# Altium PCB PCB1.PcbDoc
Units mil, origin at the board's own origin, x right, y up, seen from the top; angles counter-clockwise.
Board outline 3515 x 1700 mil, 2 copper layers (Top Layer, Bottom Layer); 31 components, 23 nets, 93 pads, 12 vias.
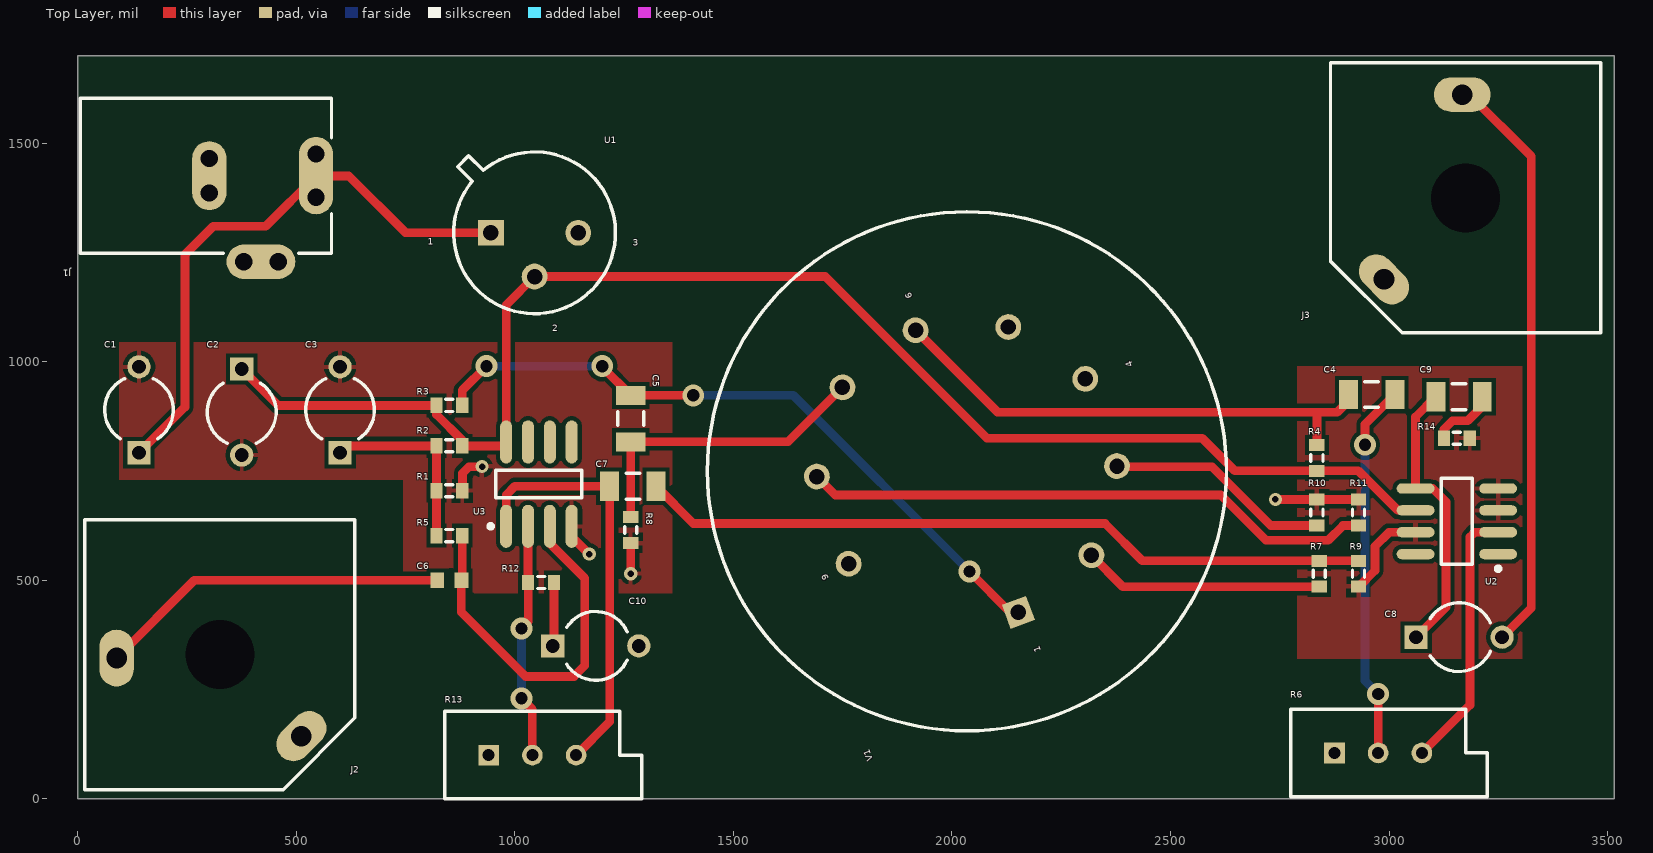
[diagram p0: Top Layer view]
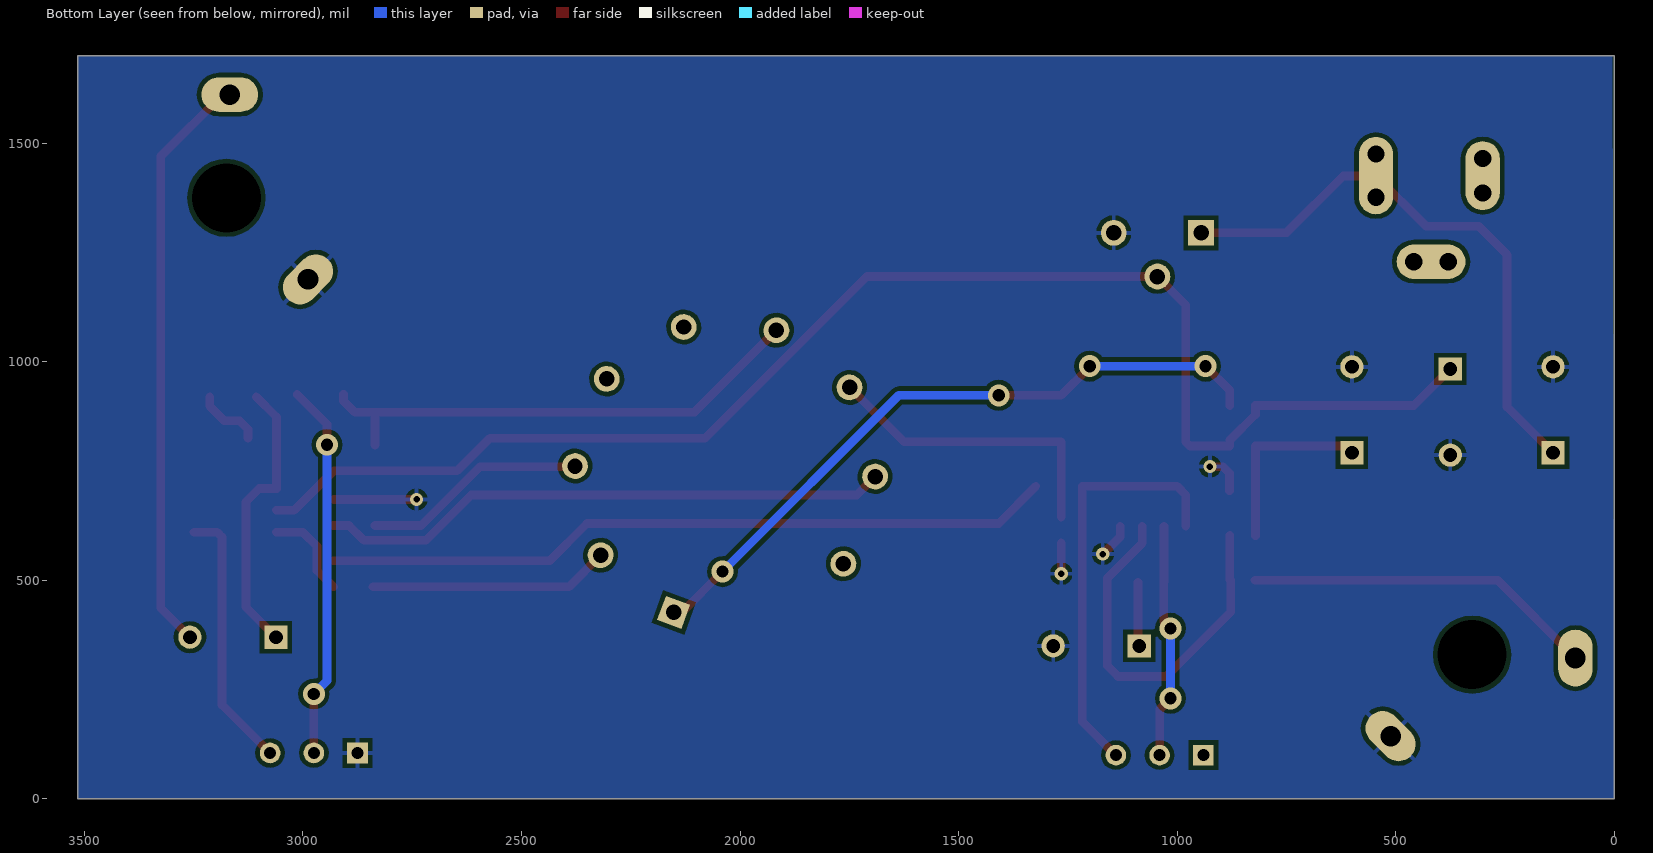
[diagram p1: Bottom Layer view, seen from below]

## Layer stack, top to bottom
Top Solder: solder mask 0.4, Solder Resist, Dk 3.5
Top Layer: signal copper 1.4
Dielectric 1: dielectric 12.6, FR-4, Dk 4.8
Bottom Layer: signal copper 1.4
Bottom Solder: solder mask 0.4, Solder Resist, Dk 3.5

## Board outline
0,0 3515,0 3515,1700 0,1700

## Design rules (kind name [scope] priority, off if disabled: settings)
Clearance [All] p1: gap=10
Height [All] p1: minheight=0 maxheight=5000 prefheight=500
PolygonConnect [All] p1: connectstyle=Relief reliefconductorwidth=10 reliefentries=4 polygonreliefangle="90 Angle" airgapwidth=10
RoutingVias [All] p1: holewidth=28 width=50 viastyle="Through Hole" minholewidth=28 minwidth=50 maxholewidth=28 maxwidth=50
SolderMaskExpansion [All] p1: expansion=4
Width [All] p1: maxlimit=20 minlimit=10 preferedwidth=20
29 further rules are at their usual default settings.

## Components (designator, comment, footprint, x,y, rotation, side; value= is the part's Value field where it differs from the comment)
C1 "Cap2" CAPR5-4X5 140,890 r90 top
C2 "Cap2" CAPR5-4X5 375,885 r270 top
C3 "Cap2" CAPR5-4X5 600,890 r90 top
C4 "Cap Semi" C1206 2960,925 r0 top
C5 "Cap Semi" C1206 1265,870 r270 top
C6 "Cap Semi" 1608[0603] 850,500 r0 top
C7 "Cap Semi" C1206 1270,715 r0 top
C8 "Cap2" CAPR5-4X5 3160,370 r0 top
C9 "Cap Semi" C1206 3160,920 r180 top
C10 "Cap2" CAPR5-4X5 1185,350 r0 top
J1 "PWR2.5" KLD-0202 5.63,1425.79 r0 top
J2 "Phonejack2" JACK/6-V2 325,330 r180 top
J3 "Phonejack2" JACK/6-V2 3175,1375 r90 top
R1 "Res3" J1-0603 850,705 r0 top
R2 "Res3" J1-0603 850,807.5 r180 top
R3 "Res3" J1-0603 850,900 r0 top
R4 "Res3" J1-0603 2835,780 r90 top
R5 "Res3" J1-0603 850,602.5 r180 top
R6 "RPot" VR5 2975,105 r0 top
R7 "Res3" J1-0603 2840,515 r90 top
R8 "Res3" J1-0603 1265,615 r270 top
R9 "Res3" J1-0603 2930,515 r90 top
R10 "Res3" J1-0603 2835,655 r90 top
R11 "Res3" J1-0603 2930,655 r90 top
R12 "Res3" J1-0603 1060,495 r0 top
R13 "RPot" VR5 1040,100 r0 top
R14 "Res3" J1-0603 3155,825 r0 top
U1 "MC78L12ACG" 79-05 1045,1295 r0 top
U2 "LM386M-1" M08A_N 3155,635 r180 top
U3 "TL072D" D008_M 1055,720 r90 top
V1 "Tube 12AX7" VTUBE-9 2034.2,749.33 r110 top

## Footprints (in the part's own frame and the unit in brackets; to place one, negate y for a bottom-side part, rotate by r counter-clockwise, add the part's x,y. Pads: shape width x height; smd on the part's side, far side on the other; paste and mask are expansions set on the pad)
79-05 [mm] "Can; 3 Leads; Pin Circle Dia. 5.08 mm; Lead Dia. 0.53 mm (max)"
  rect 1.5x1.5 hole 0.9: 1(-2.54,0)
  round 1.5 hole 0.9: 2(0,-2.54) 3(2.54,0)
  silkscreen extent -4.7,-4.7 4.7,4.7
1608[0603] [mm] "Chip Capacitor, Body 1.6x0.8mm, IPC High Density"
  rect 0.8x0.9 smd: 1(-0.7,0) 2(0.7,0)
  body extent -0.87,-0.48 0.87,0.48, height 1.3
C1206 [mm] "Chip Capacitor, Body 3.2x1.6mm, IPC High Density"
  rect 1.1x1.7 smd: 1(-1.35,0) 2(1.35,0)
  silkscreen extent -0.4,-0.75 0.4,0.75, body extent -1.7,-0.9 1.7,0.9, height 1.3
CAPR5-4X5 [mm] "Capacitor; 2 Leads"
  rect 1.35x1.35 hole 0.8: 1(-2.5,0)
  round 1.35 hole 0.8: 2(2.5,0)
  silkscreen extent -1.69,-2 1.82,2
D008_M [mm] "SOIC, 8-Leads, Body 4.9x3.9mm, Pitch 1.27mm, IPC Low Density"
  oval 2.5x0.7 smd: 1(-2.45,1.905) 2(-2.45,0.635) 3(-2.45,-0.635) 4(-2.45,-1.905) 5(2.45,-1.905) 6(2.45,-0.635) 7(2.45,0.635) 8(2.45,1.905)
  silkscreen extent -2.57,-2.5 0.8,2.93, body extent -2,-2.5 2,2.5, height 1.75
J1-0603 [mm] "Chip Resistor, Body 1.6x0.8mm, IPC High Density"
  rect 0.7x0.9 smd: 1(-0.75,0) 2(0.75,0)
  silkscreen extent -0.2,-0.35 0.2,0.35, body extent -0.85,-0.48 0.85,0.48, height 0.9
JACK/6-V2 [mm] "Connector; Jack Socket, 1/4\" [6.5mm], Thru-Hole, 2 Position, Vertical, Body 15.7 x 15.7 x 31 mm (WxTxH)"
  oval 2x3.3 hole 1.2: 1(6,0.2)
  oval 2x3.3 hole 1.2 rot 135: 5(-4.738,4.738)
  round 3.7 hole 4: MH1(0,0)
  silkscreen extent -7.85,-7.85 7.85,7.85
KLD-0202 [mm] "DC Power Jack, 2.5mm, KLD Series, PCB Mount"
  oval 2x4.5 all layers, no hole: 1(13.7,0)
  round 1.5 hole 1: 1A(13.7,-1.25) 1B(13.7,1.25) 2A(7.5,-1) 2B(7.5,1) 3A(9.5,-5) 3B(11.5,-5)
  oval 2x4 all layers, no hole: 2(7.5,0)
  oval 4x2 all layers, no hole: 3(10.5,-5)
  silkscreen extent 0,-4.5 14.6,4.5
M08A_N [mm] "SOIC, 8-Leads, Body 4.9x3.9mm, Pitch 1.27mm, IPC Medium Density"
  oval 2.2x0.6 smd: 1(-2.4,1.905) 2(-2.4,0.635) 3(-2.4,-0.635) 4(-2.4,-1.905) 5(2.4,-1.905) 6(2.4,-0.635) 7(2.4,0.635) 8(2.4,1.905)
  silkscreen extent -2.53,-2.5 0.9,2.88, body extent -2,-2.5 2,2.5, height 1.75
VR5 [mm] "Thru-Hole; 3 Leads"
  rect 1.2x1.2 hole 0.7: 1(-2.54,0)
  round 1.2 hole 0.7: 2(0,0) 3(2.54,0)
  silkscreen extent -5.08,-2.54 6.35,2.54
VTUBE-9 [mm] "Vacuum Tube; 9 Leads"
  rect 1.5x1.5 hole 0.9: 1(-8.725,0)
  round 1.5 hole 0.9: 2(-7.059,-5.128) 3(-2.696,-8.298) 4(2.696,-8.298) 5(7.059,-5.128) 6(8.725,0) 7(7.059,5.128) 8(2.696,8.298) 9(-2.696,8.298)
  silkscreen extent -15.08,-15.08 15.08,15.08

## Part data
C1 C2 C3 C8 C10: "Capacitor"
C4 C5 C6 C7 C9: "Capacitor (Semiconductor SIM Model)"
J1: "Low Voltage Power Supply Connector"
J2 J3: "Jack Socket, 1/4\" [6.5mm], Thru-Hole, Vertical, 2-Conductor Open Circuit"
R1 R2 R3 R4 R5 R7 R8 R9 R10 R11 R12 R14: "Resistor"
R6 R13: "Potentiometer"
U1: "3-Terminal Low-Current Positive Fixed Voltage Regulator"
U2: "Low Voltage Audio Power Amplifier, 8-pin Narrow SOIC"
U3: "Low-Noise JFET-Input Operational Amplifier"
V1: "High Mu Dual Triode"

## Via types
v1: diameter 50, hole 28, Top Layer to Bottom Layer, 8 vias
v2: diameter 30, hole 15, Top Layer to Bottom Layer, 4 vias

## Nets (pads, with @x,y where several pads share a name; then routed paths per layer and width w, separated by ;. In a path a pad name is that pad's centre, name@x,y a point inside that pad or via, vN(x,y) a via of type N, cw(c..) or ccw(c..) an arc to the next point about the centre after c; other vN are vias at no path point)
GND: C1.2 C2.2 C3.2 C10.2 J2.5 J3.5 R1.2 R6.1 R8.2 R9.1 R10.2 R11.2 R14.2 U1.3 U2.3 U2.4 U2.7 U3.4 | length 681.4
  Top Layer w20: C1.2 C1.2@156.57,988.43 ; C2.2@358.43,786.57 C2.2 ; C3.2 C3.2@601.57,990 ; R1.2 880,705.47 880,745 895,760 v2(925,760) ; U3.4 1130,600 v2(1170,560) ; v2(1265,515) R8.2 ; v2(2740,685) R11.2@2929.53,685 ; R9.1 2930.72,485.47 2967.72,522.46 2967.72,577.72 3000,610 U2.7
NetC1_1: C1.1 J1.1 J1.1A J1.1B U1.1 | length 1334.9
  Top Layer w20: C1.1@131.57,791.57 C1.1 245,896.57 245,1245 310,1310 430,1310 545,1425 J1.1 545.79,1425 620,1425 750,1295 U1.1
NetC3_1: C3.1 R1.1 R2.2 R5.2 | length 432.1
  Top Layer w20: C3.1 615.93,807.5 R2.2 R1.1 R5.2
NetC4_1: C4.1 R4.2 V1.6 | length 1170.5
  Top Layer w20: V1.6 2104.3,884.53 2830,884.53 ; R4.2 2835,879.53 2830,884.53 ; C4.1 2906.85,910 2881.38,884.53 2830,884.53
NetC4_2: C4.2 R6.2 | length 874.8
  Top Layer w20: v1(2945,810) 2945,856.85 C4.2 ; v1(2975,240) R6.2 R6.2@2985,115
  Bottom Layer w20: v1(2945,810) 2945,270 v1(2975,240)
NetC5_1: C5.1 R3.2 V1.1 | length 1564.9
  Top Layer w20: R3.2 879.53,934.53 v1(935,990) ; v1@1200,988.15 C5.1 v1(1408.15,923.15) ; v1(2040,520) 2133.46,426.54 V1.1
  Bottom Layer w20: v1@936.85,988.15 v1(935,990) v1(1200,990) ; v1(1408.15,923.15) 1636.85,923.15 v1(2040,520)
NetC5_2: C5.2 R8.1 V1.7 | length 708.3
  Top Layer w20: R8.1 C5.2 1624.86,816.85 V1.7
NetC6_1: C6.1 J2.1 | length 807.3
  Top Layer w20: J2.1 266.65,500 C6.1
NetC6_2: C6.2 R5.1 U3.3 | length 881.4
  Top Layer w20: R5.1 879.53,501.97 C6.2 877.56,427.44 1025,280 1135,280 1160,305 1160,505 1080,585 U3.3
NetC7_1: C7.1 R13.3 U3.1 | length 963.4
  Top Layer w20: U3.1 980,695 1000,715 C7.1 1216.85,176.85 R13.3
NetC7_2: C7.2 R7.2 R9.2 | length 1677.5
  Top Layer w20: C7.2 1408.15,630 2350,630 2435.47,544.53 R7.2 R9.2
NetC8_1: C8.1 C9.2 U2.5 | length 649.4
  Top Layer w20: C8.1 3130,438.43 3130,680 3100,710 U2.5 3060.51,873.66 C9.2
NetC8_2: C8.2 J3.1 | length 1343.9
  Top Layer w20: J3.1 3183.78,1611.22 3325,1470 3325,436.57 C8.2
NetC9_1: C9.1 R14.1 | length 151.8
  Top Layer w20: R14.1 3125.47,845.47 3145,865 3180,865 3213.15,898.15 C9.1
NetC10_1: C10.1 R12.2 | length 146.2
  Top Layer w20: C10.1 1089.53,352.95 R12.2
NetJ1_2: J1.2 J1.2A J1.2B
NetJ1_3: J1.3 J1.3A J1.3B
NetR6_3: R6.3 U2.2 | length 608.8
  Top Layer w20: R6.3 3185,215 3185,599.25 3195.75,610 U2.2
NetR7_1: R7.1 V1.2 | length 550.8
  Top Layer w20: V1.2 2390.75,485.47 R7.1
NetR10_1: R10.1 V1.3 | length 511.9
  Top Layer w20: V1.3@2378.81,760 2595,760 2729.53,625.47 R10.1
NetR11_1: R11.1 V1.8 | length 1313.4
  Top Layer w20: V1.8 1733.25,695 2615,695 2718.31,591.69 2861,591.69 2894.78,625.47 R11.1
NetR12_1: R12.1 R13.2 U3.2 | length 540.5
  Top Layer w20: v1(1015,230) 1040,205 R13.2 ; v1(1015,390) 1030.47,405.47 R12.1 1030,495.47 U3.2
  Bottom Layer w20: v1(1015,230) v1(1015,390)
VCC: C2.1 R2.1 R3.1 R4.1 U1.2 U2.6 U3.8 | length 3343.8
  Top Layer w20: C2.1 458.43,900 R3.1 820.47,879.53 879.53,820.47 R2.1 971.04,807.5 U3.8 980,1130 U1.2 1710,1195 2080,825 2572.43,825 2646.95,750.47 R4.1 2929.53,750.47 3020,660 U2.6
pads on no net: J2.MH1 J3.MH1 R13.1 U2.1 U2.8 U3.5 U3.6 U3.7 V1.4 V1.5 V1.9

## Polygon pours and split planes (outlines as drawn)
GND on Bottom Layer "GND" (solid, pour order 0): 4.11,1700 3515,1700 3515,0 0,0
GND on Top Layer "GND" (solid, pour order 14): 95,1045 95,730 745,730 745,470 1360,470 1360,1045 1205,1045
GND on Top Layer "GND" (solid, pour order 16): 2790,990 3305,990 3305,320 2790,320

## Text inside footprints (layer, text, board x,y; h text height)
J1: Mechanical 1 "Alert PCB fab to slot details" at 16.89,1664.6 h15; Mechanical 1 "Assign keep-out area to slot" at 16.89,1684.29 h15; Mechanical 1 "Mech 1 - Slot cut-out" at 16.89,1644.92 h15; Mechanical 1 "Mech 2 - Clearance, move to internal plane if present" at 16.89,1625.23 h15
J2: Mechanical 1 "Alert PCB fab to slot details" at 636.02,-50.31 h15 r180; Mechanical 1 "Slot 1.2x2.5mm, PTH" at 636.02,-30.63 h15 r180; Mechanical 1 "Assign keep-out area to slot" at 636.02,-70 h15 r180; Mechanical 1 "Mech 1 - Slot cut-out" at 636.02,-10.94 h15 r180; Mechanical 1 "Mech 2 - Clearance, move to internal plane if present" at 636.02,8.74 h15 r180
J3: Mechanical 1 "Alert PCB fab to slot details" at 2794.69,1063.98 h15 r90; Mechanical 1 "Slot 1.2x2.5mm, PTH" at 2814.37,1063.98 h15 r90; Mechanical 1 "Assign keep-out area to slot" at 2775,1063.98 h15 r90; Mechanical 1 "Mech 1 - Slot cut-out" at 2834.06,1063.98 h15 r90; Mechanical 1 "Mech 2 - Clearance, move to internal plane if present" at 2853.74,1063.98 h15 r90
U1: Top Overlay "1" at 800.87,1267.56 h15; Top Overlay "2" at 1085,1070 h15; Top Overlay "3" at 1269.17,1265.43 h15
V1: Top Overlay "1" at 2204.68,339.41 h15 r110; Top Overlay "9" at 1719.36,503.31 h15 r110; Top Overlay "6" at 1910.54,1147.55 h15 r110; Top Overlay "4" at 2414.66,990.5 h15 r110